# Altium PCB QFN-88_L9.0-W9.0-P0.35-TL-EP6.5.pcbdoc
Units mm, origin at the board's own origin, x right, y up, seen from the top; angles counter-clockwise.
Board outline 22.66 x 22.25 mm, 2 copper layers (Top Layer, Bottom Layer); 1 components, 0 nets, 89 pads, 0 vias.
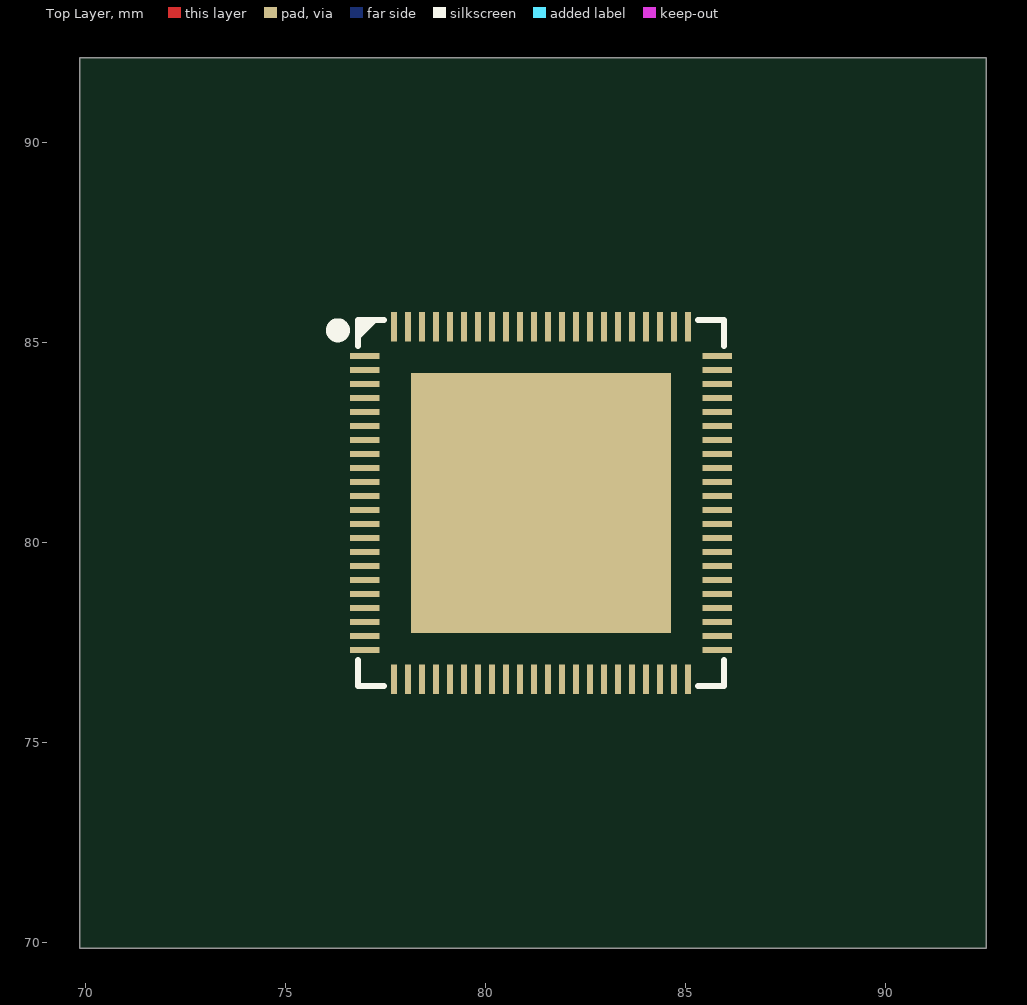
[diagram p0: Top Layer view]
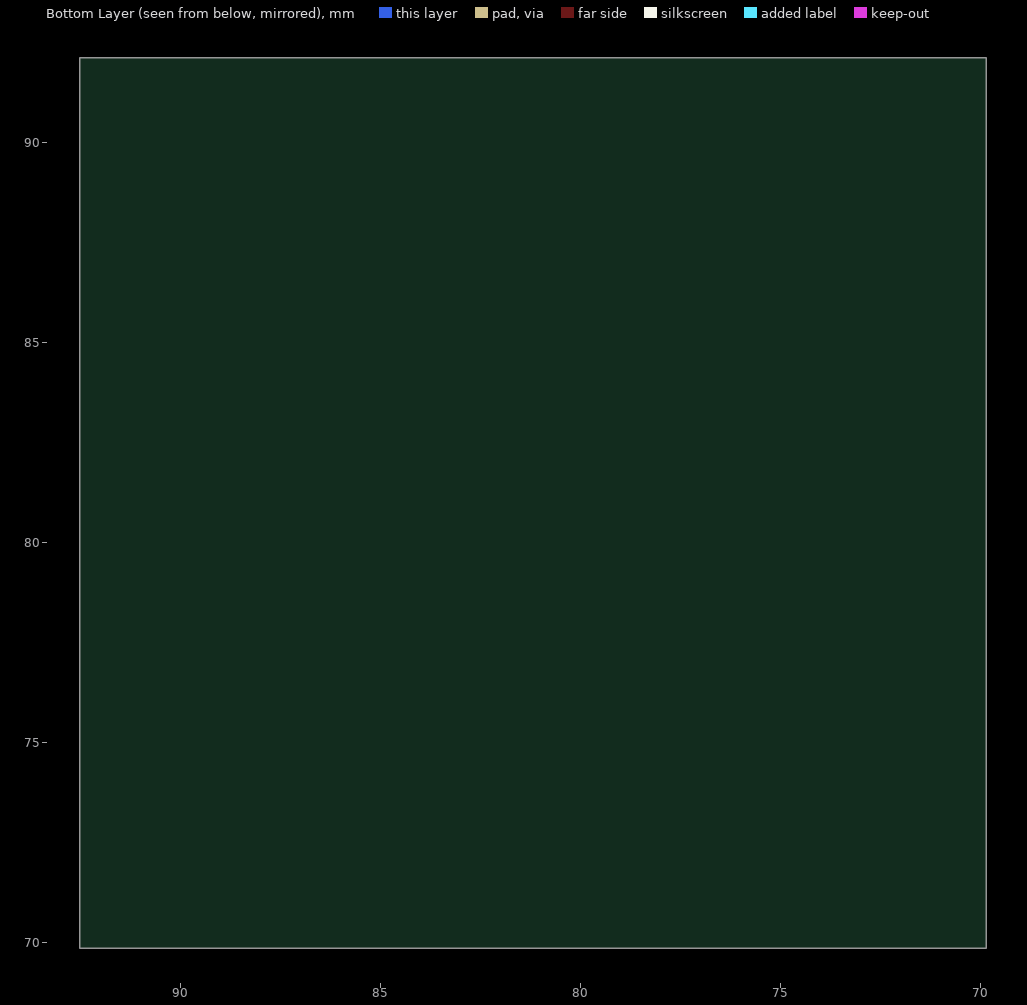
[diagram p1: Bottom Layer view, seen from below]

## Layer stack, top to bottom
Top Layer: signal copper (thickness not stored)
Dielectric: dielectric 0.32, FR-4, Dk 4.8
Bottom Layer: signal copper (thickness not stored)

## Board outline
92.507,69.85 69.85,69.85 69.85,92.105 92.507,92.105

## Design rules (kind name [scope] priority, off if disabled: settings)
BoardOutlineClearance safeClearance [All] p0: genericclearance=0.254 ignorepadtopadclearanceinfootprint=FALSE except(0: Arc-SplitContinuation Track-SplitContinuation SMDPad-SplitContinuation THPad-SplitContinuation Via-SplitContinuation Fill-SplitContinuation Poly-SplitContinuation Region-SplitContinuation Text-SplitContinuation; 0.152: Track-CutoutEdge SMDPad-CutoutEdge THPad-CutoutEdge Via-CutoutEdge Fill-CutoutEdge Region-CutoutEdge; 0.3: Track-OutlineEdge SMDPad-OutlineEdge THPad-OutlineEdge Via-OutlineEdge Fill-OutlineEdge Region-OutlineEdge Poly-OutlineEdge Text-OutlineEdge)
Clearance safeClearance [All] p1: gap=0.178 ignorepadtopadclearanceinfootprint=FALSE except(0.152: Track-Track Track-SMDPad SMDPad-SMDPad Track-THPad SMDPad-THPad THPad-THPad Track-Via SMDPad-Via THPad-Via Via-Via Track-Fill SMDPad-Fill THPad-Fill Via-Fill Fill-Fill Track-Region SMDPad-Region THPad-Region Via-Region Fill-Region Region-Region Track-Poly SMDPad-Poly THPad-Poly Via-Poly Fill-Poly Region-Poly Poly-Poly Track-Text SMDPad-Text THPad-Text Via-Text Fill-Text Region-Text Poly-Text Text-Text; 0.175: Track-Hole SMDPad-Hole THPad-Hole Via-Hole Fill-Hole Region-Hole Poly-Hole Text-Hole Sheet-Hole; 0.3: Track-Sheet SMDPad-Sheet THPad-Sheet Via-Sheet Fill-Sheet Region-Sheet Poly-Sheet Text-Sheet)
DiffPairsRouting differentialPair [All] p1: maxuncoupledlength=10 minlimit=6 maxlimit=6 mostfreqgap=6 toplayer_minwidth=5 toplayer_prefwidth=10 toplayer_maxwidth=100 bottomlayer_minwidth=5 bottomlayer_prefwidth=10 bottomlayer_maxwidth=100
PasteMaskExpansion pasteMaskExpansion [All] p1: expansion=0
PlaneConnect innerPlane [All] p1: planeconnectstyle=Relief reliefexpansion=0.508 reliefentries=4 reliefconductorwidth=0.254 reliefairgap=0.254
PolygonConnect copperRegion [All] p1: connectstyle=Relief reliefentries=4 reliefconductorwidth=10 polygonreliefangle="90 Angle" airgapwidth=10
RoutingVias viaSize [All] p1: viastyle="Through Hole" holewidth=12.0078 minholewidth=11.811 maxholewidth=236.2204 width=24.0158 minwidth=19.685 maxwidth=393.7008
SolderMaskExpansion solderMaskExpansion [All] p1: useseparateexpansions=TRUE expansion=2 expansionbottom=2
Width trackWidth [All] p1: maxlimit=100 minlimit=5 preferedwidth=10

## Components (designator, comment, footprint, x,y, rotation, side; value= is the part's Value field where it differs from the comment)
? "QFN-88_L9.0-W9.0-P0.35-TL-EP6.5" QFN-88_L9.0-W9.0-P0.35-TL-EP6.5 81.38,80.977 r0 top

## Footprints (in the part's own frame and the unit in brackets; to place one, negate y for a bottom-side part, rotate by r counter-clockwise, add the part's x,y. Pads: shape width x height; smd on the part's side, far side on the other; paste and mask are expansions set on the pad)
QFN-88_L9.0-W9.0-P0.35-TL-EP6.5 [mm]
  rect 0.74x0.15 smd: 1(-4.407,3.675) 2(-4.407,3.325) 3(-4.407,2.975) 4(-4.407,2.625) 5(-4.407,2.275) 6(-4.407,1.925) 7(-4.407,1.575) 8(-4.407,1.225) 9(-4.407,0.875) 10(-4.407,0.525) 11(-4.407,0.175) 12(-4.407,-0.175) 13(-4.407,-0.525) 14(-4.407,-0.875) 15(-4.407,-1.225) 16(-4.407,-1.575) 17(-4.407,-1.925) 18(-4.407,-2.275) 19(-4.407,-2.625) 20(-4.407,-2.975) 21(-4.407,-3.325) 22(-4.407,-3.675) 45(4.407,-3.675) 46(4.407,-3.325) 47(4.407,-2.975) 48(4.407,-2.625) 49(4.407,-2.275) 50(4.407,-1.925) 51(4.407,-1.575) 52(4.407,-1.225) 53(4.407,-0.875) 54(4.407,-0.525) 55(4.407,-0.175) 56(4.407,0.175) 57(4.407,0.525) 58(4.407,0.875) 59(4.407,1.225) 60(4.407,1.575) 61(4.407,1.925) 62(4.407,2.275) 63(4.407,2.625) 64(4.407,2.975) 65(4.407,3.325) 66(4.407,3.675)
  rect 0.15x0.74 smd: 23(-3.675,-4.407) 24(-3.325,-4.407) 25(-2.975,-4.407) 26(-2.625,-4.407) 27(-2.275,-4.407) 28(-1.925,-4.407) 29(-1.575,-4.407) 30(-1.225,-4.407) 31(-0.875,-4.407) 32(-0.525,-4.407) 33(-0.175,-4.407) 34(0.175,-4.407) 35(0.525,-4.407) 36(0.875,-4.407) 37(1.225,-4.407) 38(1.575,-4.407) 39(1.925,-4.407) 40(2.275,-4.407) 41(2.625,-4.407) 42(2.975,-4.407) 43(3.325,-4.407) 44(3.675,-4.407) 67(3.675,4.407) 68(3.325,4.407) 69(2.975,4.407) 70(2.625,4.407) 71(2.275,4.407) 72(1.925,4.407) 73(1.575,4.407) 74(1.225,4.407) 75(0.875,4.407) 76(0.525,4.407) 77(0.175,4.407) 78(-0.175,4.407) 79(-0.525,4.407) 80(-0.875,4.407) 81(-1.225,4.407) 82(-1.575,4.407) 83(-1.925,4.407) 84(-2.275,4.407) 85(-2.625,4.407) 86(-2.975,4.407) 87(-3.325,4.407) 88(-3.675,4.407)
  rect 6.5x6.5 smd: 89(0,0)
  silkscreen extent -5.18,-4.58 4.58,4.58

## Nets (pads, with @x,y where several pads share a name; then routed paths per layer and width w, separated by ;. In a path a pad name is that pad's centre, name@x,y a point inside that pad or via, vN(x,y) a via of type N, cw(c..) or ccw(c..) an arc to the next point about the centre after c; other vN are vias at no path point)
pads on no net: ?.1 ?.2 ?.3 ?.4 ?.5 ?.6 ?.7 ?.8 ?.9 ?.10 ?.11 ?.12 ?.13 ?.14 ?.15 ?.16 ?.17 ?.18 ?.19 ?.20 ?.21 ?.22 ?.23 ?.24 ?.25 ?.26 ?.27 ?.28 ?.29 ?.30 ?.31 ?.32 ?.33 ?.34 ?.35 ?.36 ?.37 ?.38 ?.39 ?.40 ?.41 ?.42 ?.43 ?.44 ?.45 ?.46 ?.47 ?.48 ?.49 ?.50 ?.51 ?.52 ?.53 ?.54 ?.55 ?.56 ?.57 ?.58 ?.59 ?.60 ?.61 ?.62 ?.63 ?.64 ?.65 ?.66 ?.67 ?.68 ?.69 ?.70 ?.71 ?.72 ?.73 ?.74 ?.75 ?.76 ?.77 ?.78 ?.79 ?.80 ?.81 ?.82 ?.83 ?.84 ?.85 ?.86 ?.87 ?.88 ?.89